# Altium PCB button.PcbDoc
Units mil, origin at the board's own origin, x right, y up, seen from the top; angles counter-clockwise.
Board outline 1750 x 1200 mil, 4 copper layers (Top Layer, Int1 (GND), Int2 (3V3), Bottom Layer), stack 53.212 mil thick; 18 components, 10 nets, 58 pads, 6 vias.
Unrouted connection lines stored in the file: 8.
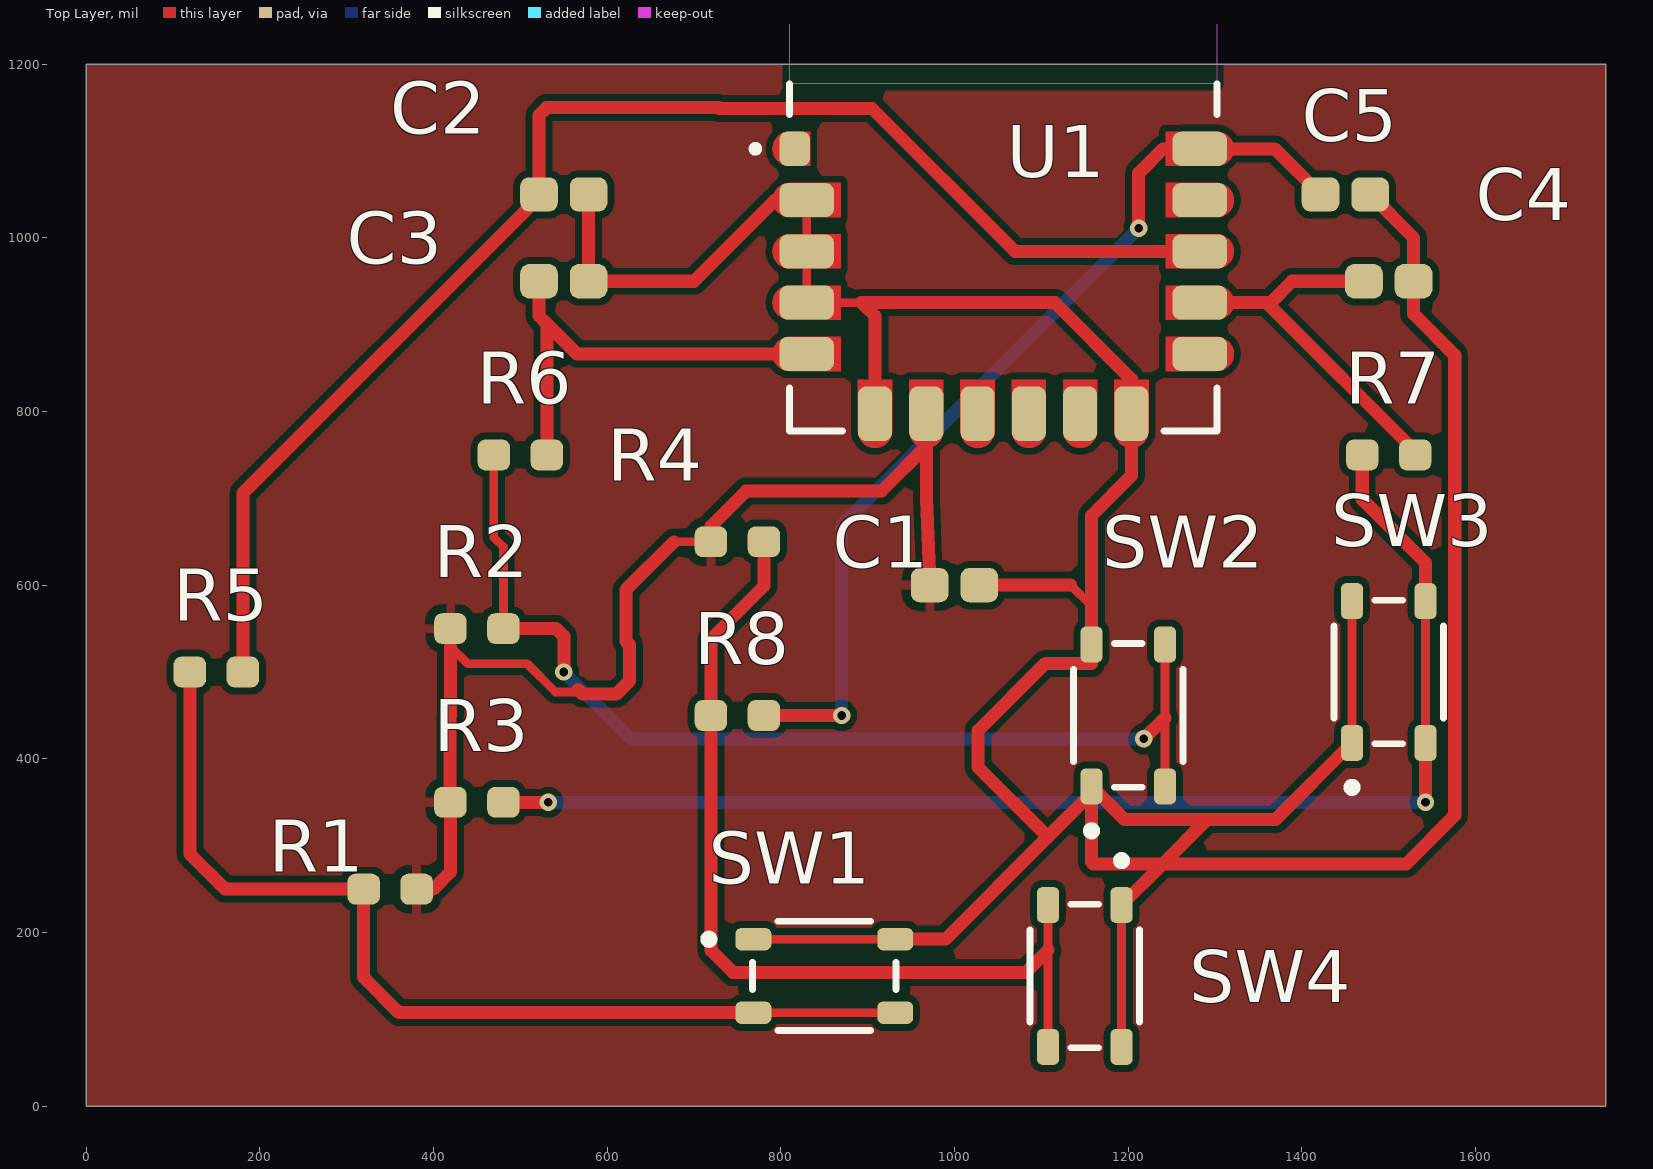
[diagram p0: Top Layer view]
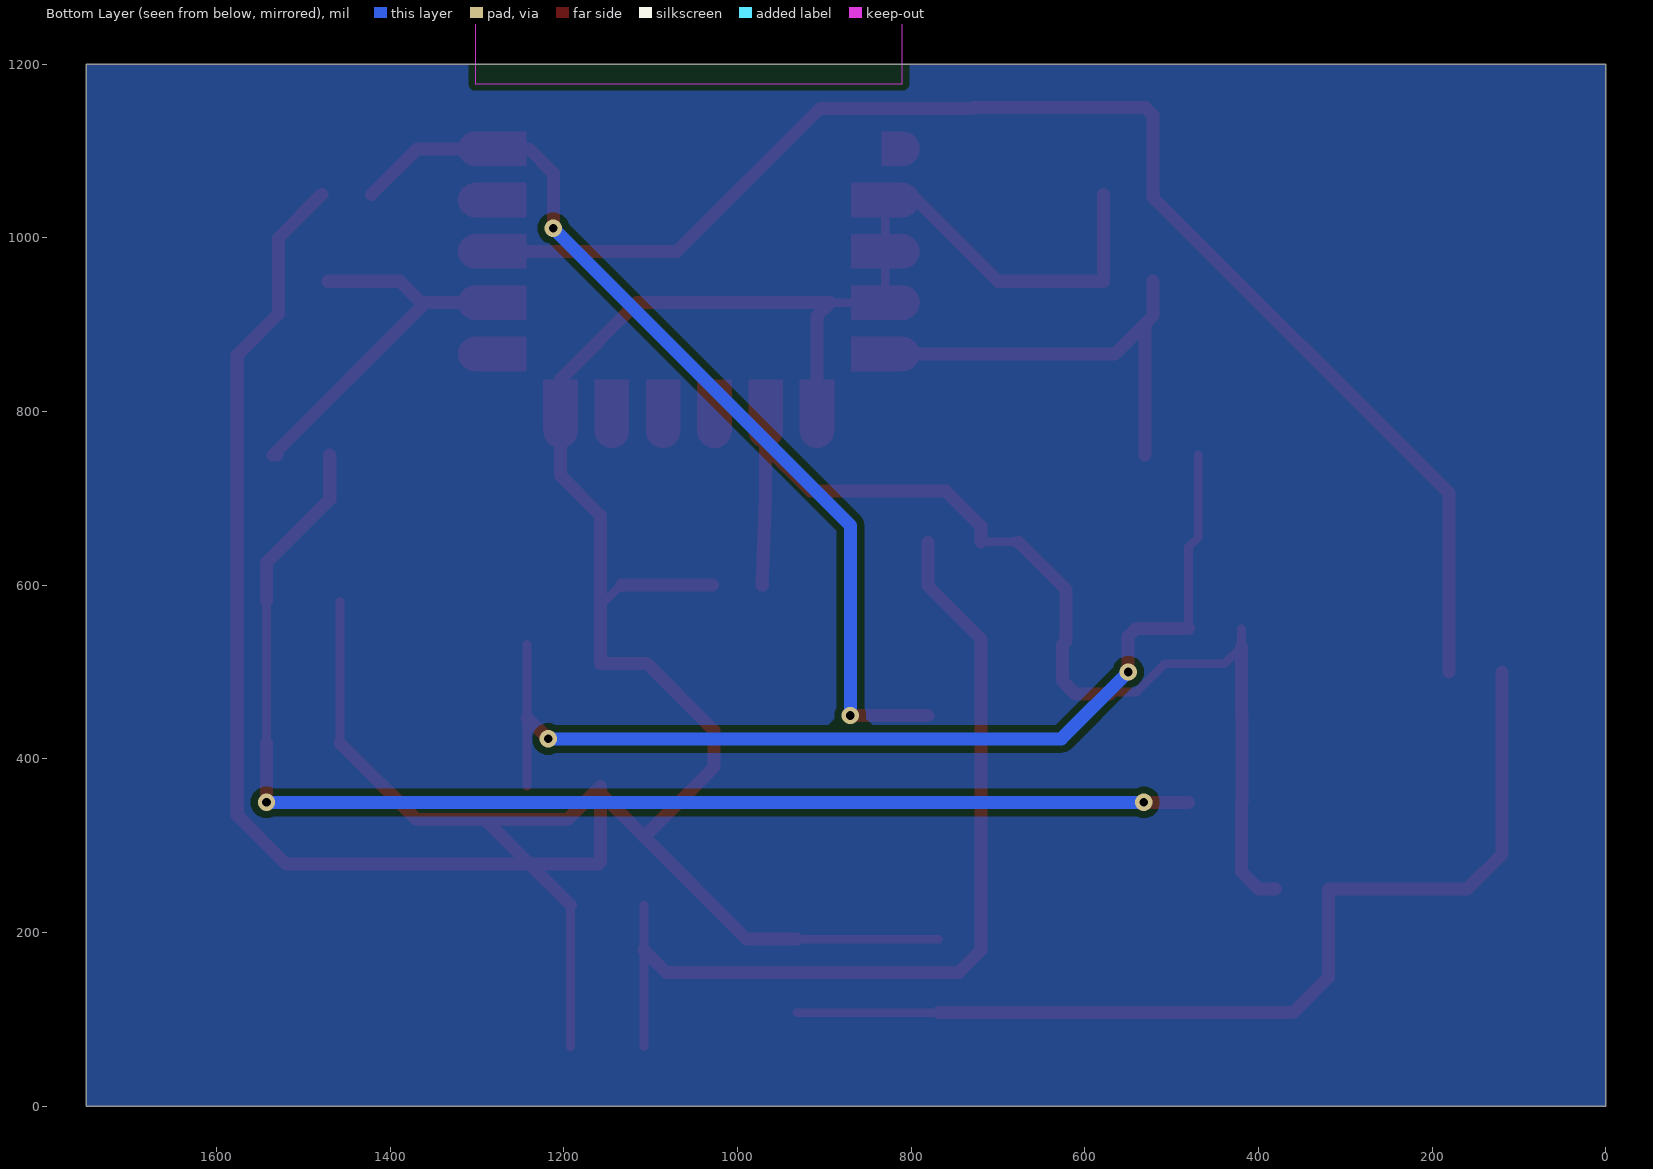
[diagram p1: Bottom Layer view, seen from below]
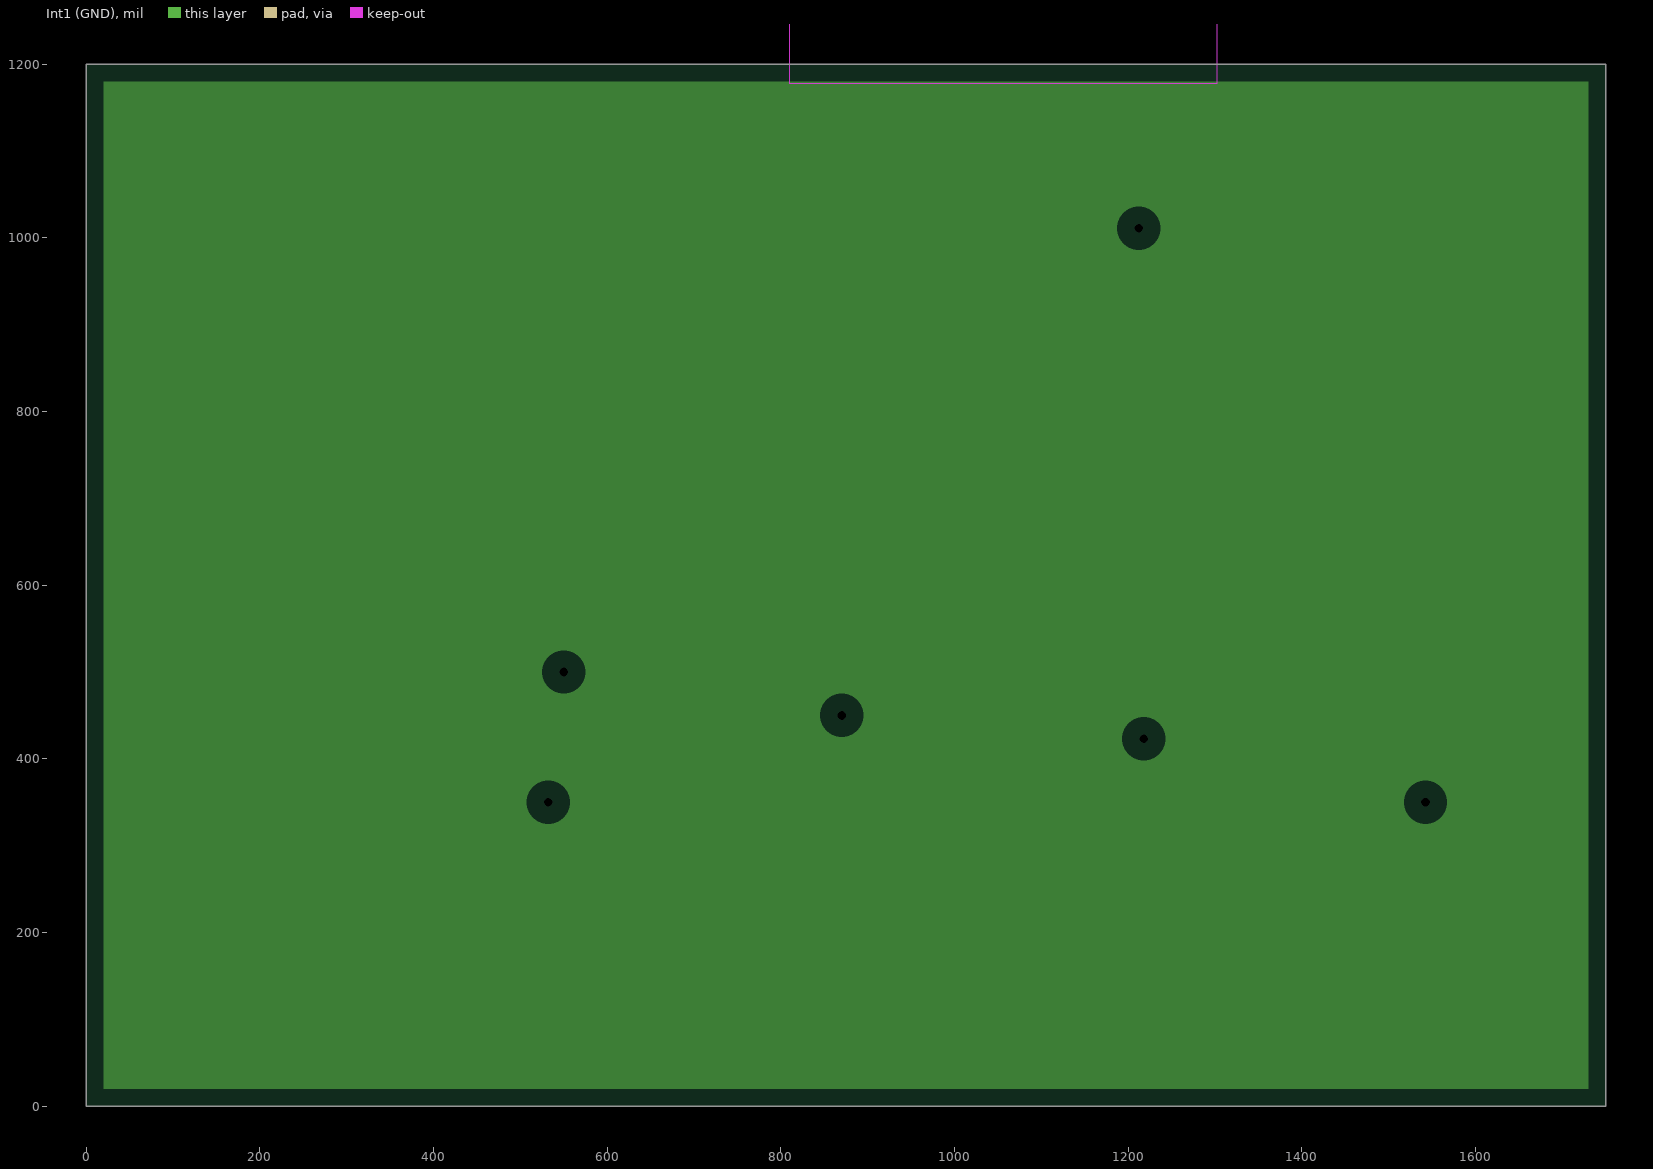
[diagram p2: Int1 (GND), clearances drawn from the general rule]
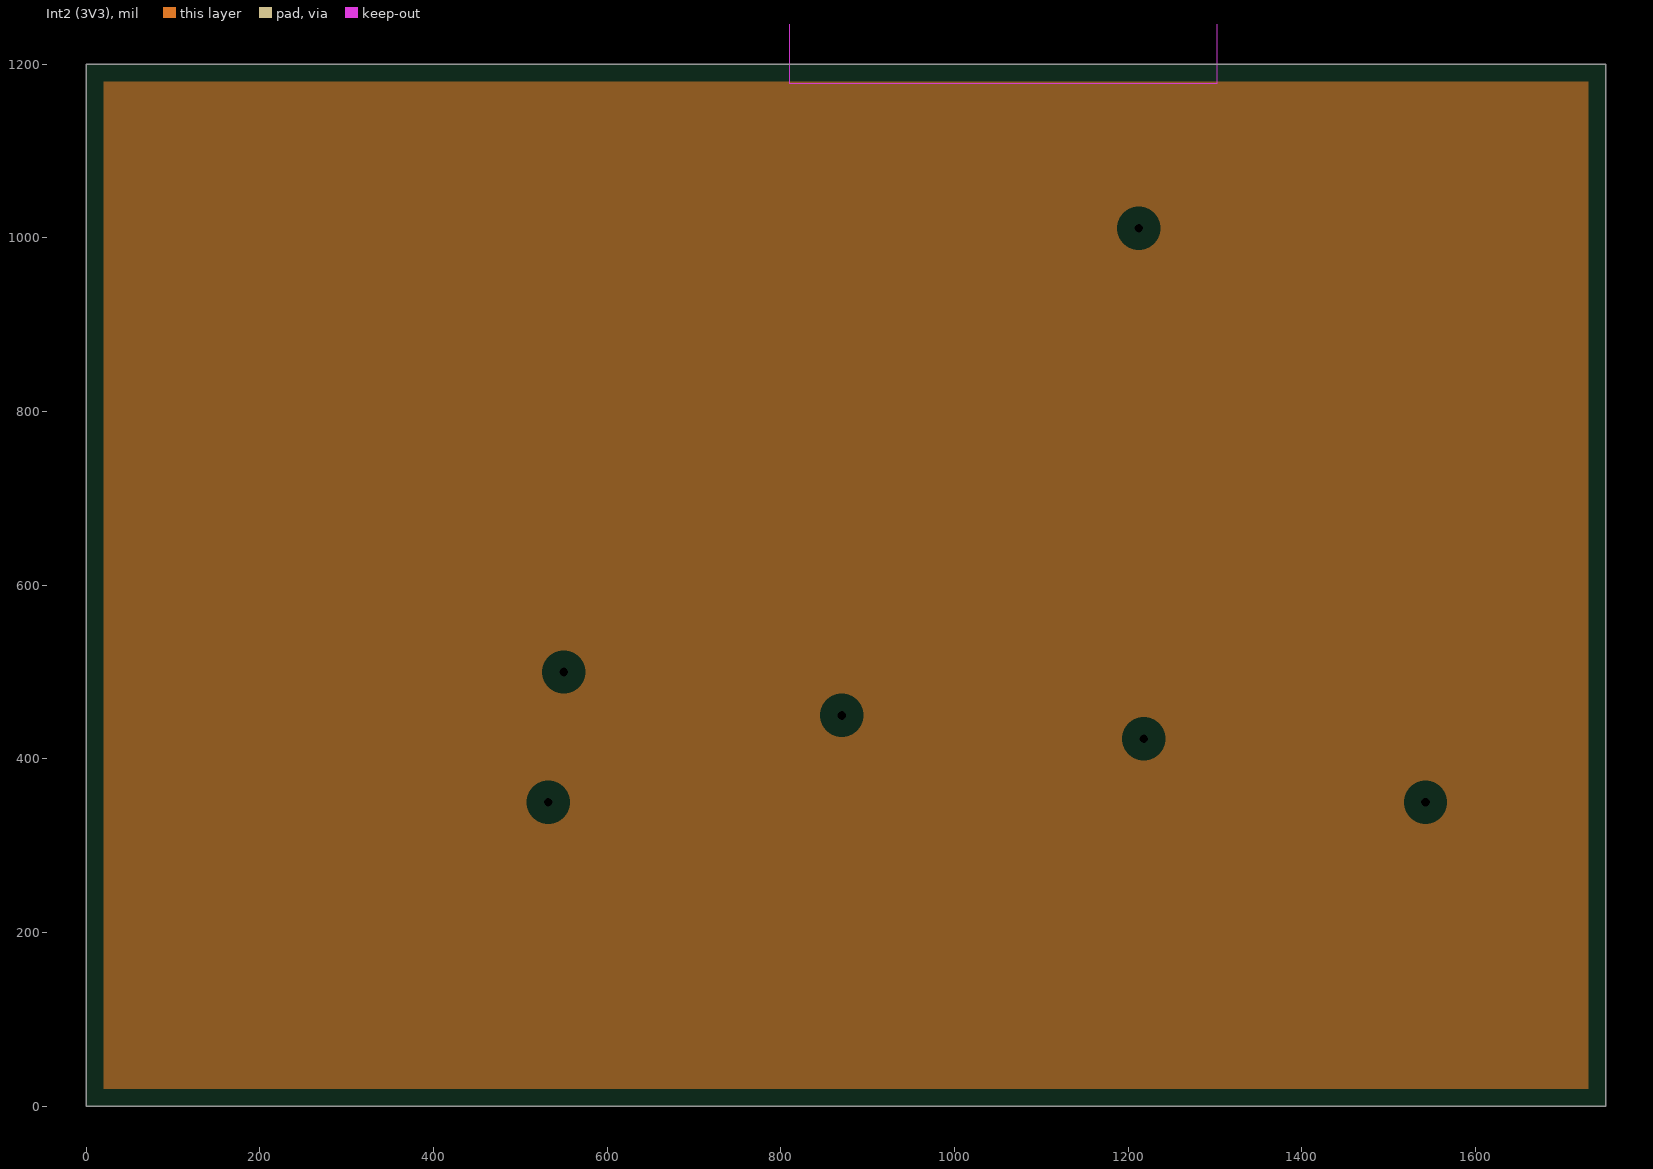
[diagram p3: Int2 (3V3), clearances drawn from the general rule]
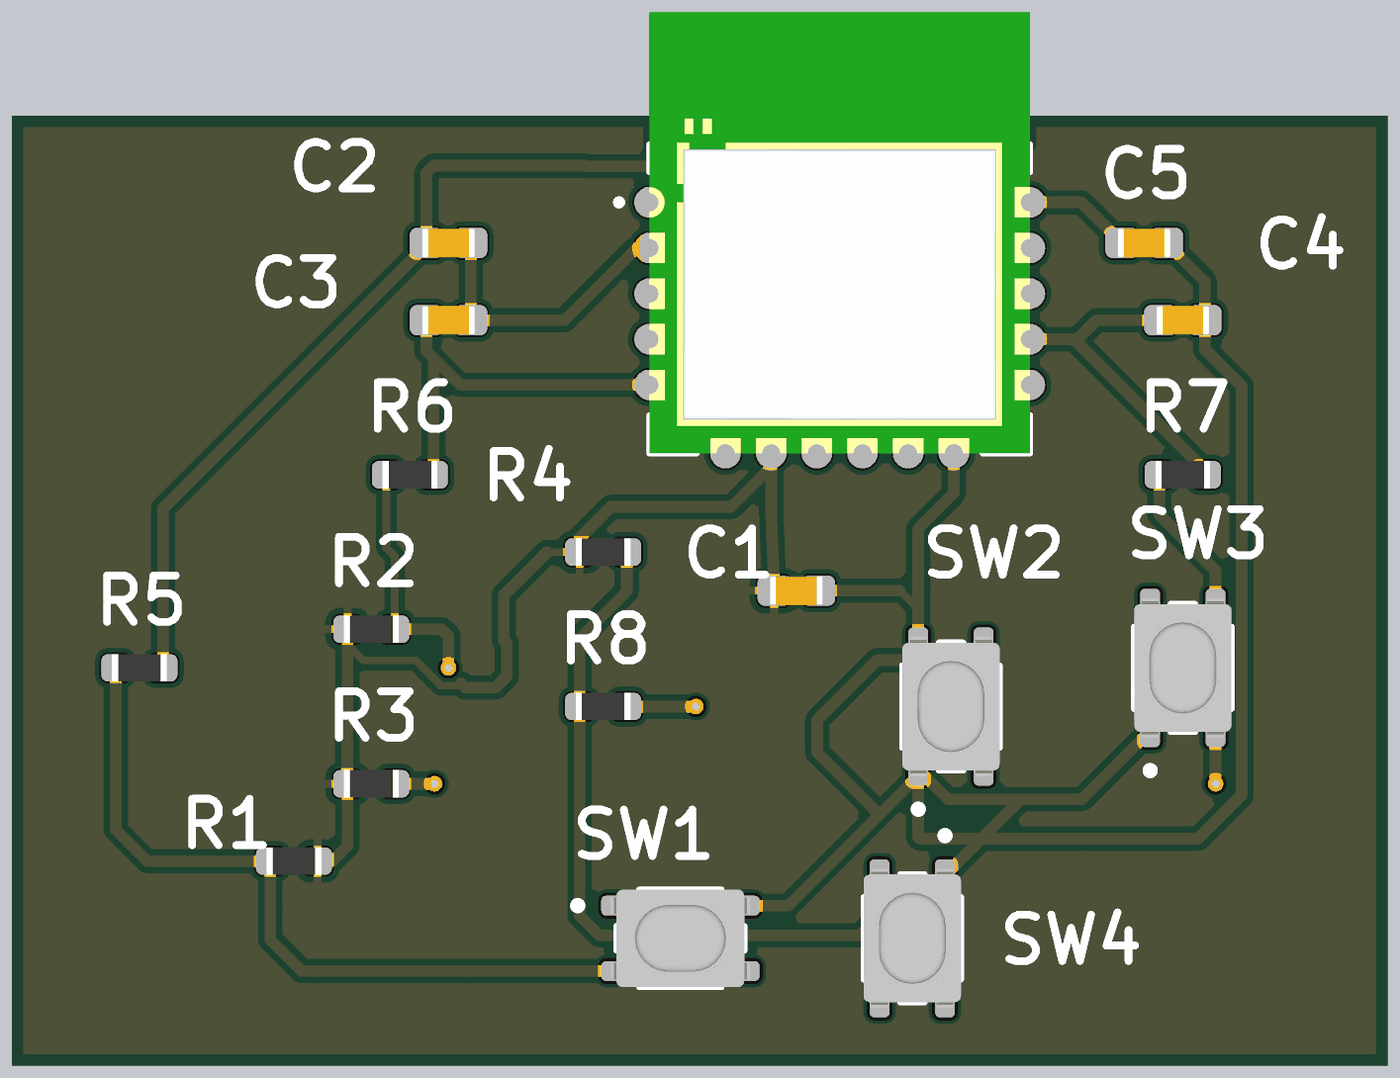
[diagram p4: 3D render of the assembled board from above, using the file's embedded part models]

## Layer stack, top to bottom
Top Solder: solder mask 1, SM-001, Dk 4
Top Layer: signal copper 1.378
Dielectric 2: prepreg 3.1, PP-008, Dk 4.1
Dielectric 4: prepreg 2.8, PP-006, Dk 4.1
Int1 (GND): plane copper 1.378, net GND
Dielectric 1: core 39, Core-042, Dk 4.6
Int2 (3V3): plane copper 1.378, net 3V3
Dielectric 3: prepreg 2.8, PP-006, Dk 4.1
Bottom Layer: signal copper 1.378
Bottom Solder: solder mask 0.4, Solder Resist, Dk 3.5

## Board outline
0,0 0,1200 1750,1200 1750,0

## Design rules (kind name [scope] priority, off if disabled: settings)
Clearance Power_Class_Clearance [All] p1: gap=8 ignorepadtopadclearanceinfootprint=FALSE
Clearance Global_Nets_Clearnace_Rule [All] p2: gap=6 ignorepadtopadclearanceinfootprint=FALSE
Clearance [All] p3: gap=15 ignorepadtopadclearanceinfootprint=FALSE
ComponentClearance ComponentClearance_1 [All] p1: gap=10 collisioncheckmode=3 verticalgap=10 showdistances=FALSE
ComponentClearance ComponentGlobalClearance [All] p2: gap=20 collisioncheckmode=3 verticalgap=20 showdistances=FALSE
MinimumSolderMaskSliver [All] p1: minsoldermaskwidth=8
PlaneClearance [All] p1: clearance=20
PlaneConnect [All] p1: planeconnectstyle=Relief reliefexpansion=20 reliefentries=4 reliefconductorwidth=10 reliefairgap=10
PolygonConnect [All] p1: connectstyle=Relief reliefconductorwidth=10 reliefentries=4 polygonreliefangle="90 Angle" airgapwidth=10
RoutingVias RoutingVias_Power [InNetClass('Power')] p1: holewidth=10 width=24 viastyle="Through Hole" minholewidth=10 minwidth=24 maxholewidth=10 maxwidth=24
RoutingVias RoutingVias_Signal [All] p2: holewidth=10 width=20 viastyle="Through Hole" minholewidth=10 minwidth=20 maxholewidth=10 maxwidth=20
RoutingVias [All] p3: holewidth=28 width=50 viastyle="Through Hole" minholewidth=28 minwidth=50 maxholewidth=28 maxwidth=50
SilkToSilkClearance [All] p1: silktosilkclearance=8
SilkToSolderMaskClearance [IsPad] p1: minsilkscreentomaskgap=4 clearancetoexposedcopper=TRUE
SolderMaskExpansion [All] p1: expansion=4 istentingtop=FALSE
SupplyNets "Schematic Supply Nets_2" [InNet('GND')] p1: voltage=0.000
SupplyNets "Schematic Supply Nets_1" [InNet('3V3')] p2: voltage=0.000
UnRoutedNet [All] p1: checkbadconnections=TRUE
Width Width_1 [All] p1: maxlimit=20 minlimit=10 preferedwidth=15
Width WidthPowerClass [InNetClass('Power')] p2: maxlimit=100 minlimit=30 preferedwidth=50
Width WidthGlobalNets [All] p3: maxlimit=6 minlimit=6 preferedwidth=6
23 further rules are at their usual default settings.

## Classes and differential pairs
net class Power: 3V3 GND

## Components (designator, comment, footprint, x,y, rotation, side; value= is the part's Value field where it differs from the comment)
C1 "10uF" CAPC1608X10N 1000,600 r0 top
C2 "10uF" CAPC1608X10N 550,1050 r0 top
C3 "10uF" CAPC1608X10N 550,950 r0 top
C4 "10uF" CAPC1608X10N 1500,950 r0 top
C5 "10uF" CAPC1608X10N 1450,1050 r0 top
R1 "10K" RESC1608X06N 350,250 r180 top
R2 "10K" RESC1608X06N 450,550 r0 top
R3 "10K" RESC1608X06N 450,350 r0 top
R4 "10K" RESC1608X06N 750,650 r0 top
R5 "47K" RESC1608X06N 150,500 r0 top
R6 "47K" RESC1608X06N 500,750 r0 top
R7 "47K" RESC1608X06N 1500,750 r0 top
R8 "47K" RESC1608X06N 750,450 r0 top
SW1 "SW, Momentary" SW_PTS810 850,150 r0 top
SW2 "SW, Momentary" SW_PTS810 1200,450 r90 top
SW3 "SW, Momentary" SW_PTS810 1500,500 r90 top
SW4 "SW, Momentary" SW_PTS810 1150,150 r270 top
U1 "DA14531MOD" DLG_DA14531MOD-00F01002 1056.03,950 r0 top

## Footprints (in the part's own frame and the unit in brackets; to place one, negate y for a bottom-side part, rotate by r counter-clockwise, add the part's x,y. Pads: shape width x height; smd on the part's side, far side on the other; paste and mask are expansions set on the pad)
CAPC1608X10N [mm] "Chip Capacitor, 2-Leads, Body 1.60x0.80mm, Murata, IPC Medium Density"
  rrect50% 1.1x1 smd mask+0.064: 1(-0.725,0) 2(0.725,0)
  body extent -0.87,-0.48 0.87,0.48, height 0.95
DLG_DA14531MOD-00F01002 [mm] "Dialog, DA14531MOD"
  rrect50% 0.9x1 smd paste-1 mask+0: J1(-6.1,3.875)
  rrect50% 1.6x1 smd paste+0 mask+0: J2(-5.75,2.375) J3(-5.75,0.875) J4(-5.75,-0.625) J5(-5.75,-2.125)
  rrect50% 1x1.6 smd paste+0 mask+0: J6(-3.75,-3.875)
  rrect50% 1x1.6 smd paste-1 mask+0: J7(-2.25,-3.875) J8(-0.75,-3.875) J9(0.75,-3.875) J10(2.25,-3.875) J11(3.75,-3.875)
  rrect50% 1.6x1 smd paste-1 mask+0: J12(5.75,-2.125) J13(5.75,-0.625) J14(5.75,0.875) J15(5.75,2.375) J16(5.75,3.875)
  Top Layer region: -4.75,1.875 -6.25,1.875 -6.276,1.876 -6.302,1.878 -6.328,1.881 -6.354,1.886 -6.379,1.892 -6.405,1.899 -6.429,1.908 -6.453,1.918 -6.477,1.929 -6.5,1.942 -6.522,1.956 -6.544,1.97 -6.565,1.986 -6.585,2.003 -6.604,2.021 -6.622,2.04 -6.639,2.06 -6.655,2.081 -6.669,2.103 -6.683,2.125 -6.696,2.148 -6.707,2.172 -6.717,2.196 -6.726,2.22 -6.733,2.246 -6.739,2.271 -6.744,2.297 -6.747,2.323 -6.749,2.349 -6.75,2.375 -6.749,2.401 -6.747,2.427 -6.744,2.453 -6.739,2.479 -6.733,2.504 -6.726,2.53 -6.717,2.554 -6.707,2.578 -6.696,2.602 -6.683,2.625 -6.669,2.647 -6.655,2.669 -6.639,2.69 -6.622,2.71 -6.604,2.729 -6.585,2.747 -6.565,2.764 -6.544,2.78 -6.522,2.794 -6.5,2.808 -6.477,2.821 -6.453,2.832 -6.429,2.842 -6.405,2.851 -6.379,2.858 -6.354,2.864 -6.328,2.869 -6.302,2.872 -6.276,2.874 -6.25,2.875 -4.75,2.875
  Top Layer region: 6.276,4.374 6.302,4.372 6.328,4.369 6.354,4.364 6.379,4.358 6.405,4.351 6.429,4.342 6.453,4.332 6.477,4.321 6.5,4.308 6.522,4.294 6.544,4.28 6.565,4.264 6.585,4.247 6.604,4.229 6.622,4.21 6.639,4.19 6.655,4.169 6.669,4.147 6.683,4.125 6.696,4.102 6.707,4.078 6.717,4.054 6.726,4.03 6.733,4.004 6.739,3.979 6.744,3.953 6.747,3.927 6.749,3.901 6.75,3.875 6.749,3.849 6.747,3.823 6.744,3.797 6.739,3.771 6.733,3.746 6.726,3.72 6.717,3.696 6.707,3.672 6.696,3.648 6.683,3.625 6.669,3.603 6.655,3.581 6.639,3.56 6.622,3.54 6.604,3.521 6.585,3.503 6.565,3.486 6.544,3.47 6.522,3.456 6.5,3.442 6.477,3.429 6.453,3.418 6.429,3.408 6.405,3.399 6.379,3.392 6.354,3.386 6.328,3.381 6.302,3.378 6.276,3.376 6.25,3.375 4.75,3.375 4.75,4.375 6.25,4.375
  Top Layer region: 6.276,1.374 6.302,1.372 6.328,1.369 6.354,1.364 6.379,1.358 6.405,1.351 6.429,1.342 6.453,1.332 6.477,1.321 6.5,1.308 6.522,1.294 6.544,1.28 6.565,1.264 6.585,1.247 6.604,1.229 6.622,1.21 6.639,1.19 6.655,1.169 6.669,1.147 6.683,1.125 6.696,1.102 6.707,1.078 6.717,1.054 6.726,1.03 6.733,1.004 6.739,0.979 6.744,0.953 6.747,0.927 6.749,0.901 6.75,0.875 6.749,0.849 6.747,0.823 6.744,0.797 6.739,0.771 6.733,0.746 6.726,0.72 6.717,0.696 6.707,0.672 6.696,0.648 6.683,0.625 6.669,0.603 6.655,0.581 6.639,0.56 6.622,0.54 6.604,0.521 6.585,0.503 6.565,0.486 6.544,0.47 6.522,0.456 6.5,0.442 6.477,0.429 6.453,0.418 6.429,0.408 6.405,0.399 6.379,0.392 6.354,0.386 6.328,0.381 6.302,0.378 6.276,0.376 6.25,0.375 4.75,0.375 4.75,1.375 6.25,1.375
  Top Layer region: 6.276,-0.126 6.302,-0.128 6.328,-0.131 6.354,-0.136 6.379,-0.142 6.405,-0.149 6.429,-0.158 6.453,-0.168 6.477,-0.179 6.5,-0.192 6.522,-0.206 6.544,-0.22 6.565,-0.236 6.585,-0.253 6.604,-0.271 6.622,-0.29 6.639,-0.31 6.655,-0.331 6.669,-0.353 6.683,-0.375 6.696,-0.398 6.707,-0.422 6.717,-0.446 6.726,-0.47 6.733,-0.496 6.739,-0.521 6.744,-0.547 6.747,-0.573 6.749,-0.599 6.75,-0.625 6.749,-0.651 6.747,-0.677 6.744,-0.703 6.739,-0.729 6.733,-0.754 6.726,-0.78 6.717,-0.804 6.707,-0.828 6.696,-0.852 6.683,-0.875 6.669,-0.897 6.655,-0.919 6.639,-0.94 6.622,-0.96 6.604,-0.979 6.585,-0.997 6.565,-1.014 6.544,-1.03 6.522,-1.044 6.5,-1.058 6.477,-1.071 6.453,-1.082 6.429,-1.092 6.405,-1.101 6.379,-1.108 6.354,-1.114 6.328,-1.119 6.302,-1.122 6.276,-1.124 6.25,-1.125 4.75,-1.125 4.75,-0.125 6.25,-0.125
  Top Layer region: 6.276,-1.626 6.302,-1.628 6.328,-1.631 6.354,-1.636 6.379,-1.642 6.405,-1.649 6.429,-1.658 6.453,-1.668 6.477,-1.679 6.5,-1.692 6.522,-1.706 6.544,-1.72 6.565,-1.736 6.585,-1.753 6.604,-1.771 6.622,-1.79 6.639,-1.81 6.655,-1.831 6.669,-1.853 6.683,-1.875 6.696,-1.898 6.707,-1.922 6.717,-1.946 6.726,-1.97 6.733,-1.996 6.739,-2.021 6.744,-2.047 6.747,-2.073 6.749,-2.099 6.75,-2.125 6.749,-2.151 6.747,-2.177 6.744,-2.203 6.739,-2.229 6.733,-2.254 6.726,-2.28 6.717,-2.304 6.707,-2.328 6.696,-2.352 6.683,-2.375 6.669,-2.397 6.655,-2.419 6.639,-2.44 6.622,-2.46 6.604,-2.479 6.585,-2.497 6.565,-2.514 6.544,-2.53 6.522,-2.544 6.5,-2.558 6.477,-2.571 6.453,-2.582 6.429,-2.592 6.405,-2.601 6.379,-2.608 6.354,-2.614 6.328,-2.619 6.302,-2.622 6.276,-2.624 6.25,-2.625 4.75,-2.625 4.75,-1.625 6.25,-1.625
  Top Layer region: 4.25,-4.375 4.249,-4.401 4.247,-4.427 4.244,-4.453 4.239,-4.479 4.233,-4.504 4.226,-4.53 4.217,-4.554 4.207,-4.578 4.196,-4.602 4.183,-4.625 4.169,-4.647 4.155,-4.669 4.139,-4.69 4.122,-4.71 4.104,-4.729 4.085,-4.747 4.065,-4.764 4.044,-4.78 4.022,-4.794 4,-4.808 3.977,-4.821 3.953,-4.832 3.929,-4.842 3.905,-4.851 3.879,-4.858 3.854,-4.864 3.828,-4.869 3.802,-4.872 3.776,-4.874 3.75,-4.875 3.724,-4.874 3.698,-4.872 3.672,-4.869 3.646,-4.864 3.621,-4.858 3.595,-4.851 3.571,-4.842 3.547,-4.832 3.523,-4.821 3.5,-4.808 3.478,-4.794 3.456,-4.78 3.435,-4.764 3.415,-4.747 3.396,-4.729 3.378,-4.71 3.361,-4.69 3.345,-4.669 3.331,-4.647 3.317,-4.625 3.304,-4.602 3.293,-4.578 3.283,-4.554 3.274,-4.53 3.267,-4.504 3.261,-4.479 3.256,-4.453 3.253,-4.427 3.251,-4.401 3.25,-4.375 3.25,-2.875 4.25,-2.875
  Top Layer region: 2.75,-4.375 2.749,-4.401 2.747,-4.427 2.744,-4.453 2.739,-4.479 2.733,-4.504 2.726,-4.53 2.717,-4.554 2.707,-4.578 2.696,-4.602 2.683,-4.625 2.669,-4.647 2.655,-4.669 2.639,-4.69 2.622,-4.71 2.604,-4.729 2.585,-4.747 2.565,-4.764 2.544,-4.78 2.522,-4.794 2.5,-4.808 2.477,-4.821 2.453,-4.832 2.429,-4.842 2.405,-4.851 2.379,-4.858 2.354,-4.864 2.328,-4.869 2.302,-4.872 2.276,-4.874 2.25,-4.875 2.224,-4.874 2.198,-4.872 2.172,-4.869 2.146,-4.864 2.121,-4.858 2.095,-4.851 2.071,-4.842 2.047,-4.832 2.023,-4.821 2,-4.808 1.978,-4.794 1.956,-4.78 1.935,-4.764 1.915,-4.747 1.896,-4.729 1.878,-4.71 1.861,-4.69 1.845,-4.669 1.831,-4.647 1.817,-4.625 1.804,-4.602 1.793,-4.578 1.783,-4.554 1.774,-4.53 1.767,-4.504 1.761,-4.479 1.756,-4.453 1.753,-4.427 1.751,-4.401 1.75,-4.375 1.75,-2.875 2.75,-2.875
  Top Layer region: 1.25,-4.375 1.249,-4.401 1.247,-4.427 1.244,-4.453 1.239,-4.479 1.233,-4.504 1.226,-4.53 1.217,-4.554 1.207,-4.578 1.196,-4.602 1.183,-4.625 1.169,-4.647 1.155,-4.669 1.139,-4.69 1.122,-4.71 1.104,-4.729 1.085,-4.747 1.065,-4.764 1.044,-4.78 1.022,-4.794 1,-4.808 0.977,-4.821 0.953,-4.832 0.929,-4.842 0.905,-4.851 0.879,-4.858 0.854,-4.864 0.828,-4.869 0.802,-4.872 0.776,-4.874 0.75,-4.875 0.724,-4.874 0.698,-4.872 0.672,-4.869 0.646,-4.864 0.621,-4.858 0.595,-4.851 0.571,-4.842 0.547,-4.832 0.523,-4.821 0.5,-4.808 0.478,-4.794 0.456,-4.78 0.435,-4.764 0.415,-4.747 0.396,-4.729 0.378,-4.71 0.361,-4.69 0.345,-4.669 0.331,-4.647 0.317,-4.625 0.304,-4.602 0.293,-4.578 0.283,-4.554 0.274,-4.53 0.267,-4.504 0.261,-4.479 0.256,-4.453 0.253,-4.427 0.251,-4.401 0.25,-4.375 0.25,-2.875 1.25,-2.875
  Top Layer region: -0.25,-4.375 -0.251,-4.401 -0.253,-4.427 -0.256,-4.453 -0.261,-4.479 -0.267,-4.504 -0.274,-4.53 -0.283,-4.554 -0.293,-4.578 -0.304,-4.602 -0.317,-4.625 -0.331,-4.647 -0.345,-4.669 -0.361,-4.69 -0.378,-4.71 -0.396,-4.729 -0.415,-4.747 -0.435,-4.764 -0.456,-4.78 -0.478,-4.794 -0.5,-4.808 -0.523,-4.821 -0.547,-4.832 -0.571,-4.842 -0.595,-4.851 -0.621,-4.858 -0.646,-4.864 -0.672,-4.869 -0.698,-4.872 -0.724,-4.874 -0.75,-4.875 -0.776,-4.874 -0.802,-4.872 -0.828,-4.869 -0.854,-4.864 -0.879,-4.858 -0.905,-4.851 -0.929,-4.842 -0.953,-4.832 -0.977,-4.821 -1,-4.808 -1.022,-4.794 -1.044,-4.78 -1.065,-4.764 -1.085,-4.747 -1.104,-4.729 -1.122,-4.71 -1.139,-4.69 -1.155,-4.669 -1.169,-4.647 -1.183,-4.625 -1.196,-4.602 -1.207,-4.578 -1.217,-4.554 -1.226,-4.53 -1.233,-4.504 -1.239,-4.479 -1.244,-4.453 -1.247,-4.427 -1.249,-4.401 -1.25,-4.375 -1.25,-2.875 -0.25,-2.875
  Top Layer region: -1.75,-4.375 -1.751,-4.401 -1.753,-4.427 -1.756,-4.453 -1.761,-4.479 -1.767,-4.504 -1.774,-4.53 -1.783,-4.554 -1.793,-4.578 -1.804,-4.602 -1.817,-4.625 -1.831,-4.647 -1.845,-4.669 -1.861,-4.69 -1.878,-4.71 -1.896,-4.729 -1.915,-4.747 -1.935,-4.764 -1.956,-4.78 -1.978,-4.794 -2,-4.808 -2.023,-4.821 -2.047,-4.832 -2.071,-4.842 -2.095,-4.851 -2.121,-4.858 -2.146,-4.864 -2.172,-4.869 -2.198,-4.872 -2.224,-4.874 -2.25,-4.875 -2.276,-4.874 -2.302,-4.872 -2.328,-4.869 -2.354,-4.864 -2.379,-4.858 -2.405,-4.851 -2.429,-4.842 -2.453,-4.832 -2.477,-4.821 -2.5,-4.808 -2.522,-4.794 -2.544,-4.78 -2.565,-4.764 -2.585,-4.747 -2.604,-4.729 -2.622,-4.71 -2.639,-4.69 -2.655,-4.669 -2.669,-4.647 -2.683,-4.625 -2.696,-4.602 -2.707,-4.578 -2.717,-4.554 -2.726,-4.53 -2.733,-4.504 -2.739,-4.479 -2.744,-4.453 -2.747,-4.427 -2.749,-4.401 -2.75,-4.375 -2.75,-2.875 -1.75,-2.875
  Top Layer region: -3.25,-4.375 -3.251,-4.401 -3.253,-4.427 -3.256,-4.453 -3.261,-4.479 -3.267,-4.504 -3.274,-4.53 -3.283,-4.554 -3.293,-4.578 -3.304,-4.602 -3.317,-4.625 -3.331,-4.647 -3.345,-4.669 -3.361,-4.69 -3.378,-4.71 -3.396,-4.729 -3.415,-4.747 -3.435,-4.764 -3.456,-4.78 -3.478,-4.794 -3.5,-4.808 -3.523,-4.821 -3.547,-4.832 -3.571,-4.842 -3.595,-4.851 -3.621,-4.858 -3.646,-4.864 -3.672,-4.869 -3.698,-4.872 -3.724,-4.874 -3.75,-4.875 -3.776,-4.874 -3.802,-4.872 -3.828,-4.869 -3.854,-4.864 -3.879,-4.858 -3.905,-4.851 -3.929,-4.842 -3.953,-4.832 -3.977,-4.821 -4,-4.808 -4.022,-4.794 -4.044,-4.78 -4.065,-4.764 -4.085,-4.747 -4.104,-4.729 -4.122,-4.71 -4.139,-4.69 -4.155,-4.669 -4.169,-4.647 -4.183,-4.625 -4.196,-4.602 -4.207,-4.578 -4.217,-4.554 -4.226,-4.53 -4.233,-4.504 -4.239,-4.479 -4.244,-4.453 -4.247,-4.427 -4.249,-4.401 -4.25,-4.375 -4.25,-2.875 -3.25,-2.875
  Top Layer region: -4.75,-2.625 -6.25,-2.625 -6.276,-2.624 -6.302,-2.622 -6.328,-2.619 -6.354,-2.614 -6.379,-2.608 -6.405,-2.601 -6.429,-2.592 -6.453,-2.582 -6.477,-2.571 -6.5,-2.558 -6.522,-2.544 -6.544,-2.53 -6.565,-2.514 -6.585,-2.497 -6.604,-2.479 -6.622,-2.46 -6.639,-2.44 -6.655,-2.419 -6.669,-2.397 -6.683,-2.375 -6.696,-2.352 -6.707,-2.328 -6.717,-2.304 -6.726,-2.28 -6.733,-2.254 -6.739,-2.229 -6.744,-2.203 -6.747,-2.177 -6.749,-2.151 -6.75,-2.125 -6.749,-2.099 -6.747,-2.073 -6.744,-2.047 -6.739,-2.021 -6.733,-1.996 -6.726,-1.97 -6.717,-1.946 -6.707,-1.922 -6.696,-1.898 -6.683,-1.875 -6.669,-1.853 -6.655,-1.831 -6.639,-1.81 -6.622,-1.79 -6.604,-1.771 -6.585,-1.753 -6.565,-1.736 -6.544,-1.72 -6.522,-1.706 -6.5,-1.692 -6.477,-1.679 -6.453,-1.668 -6.429,-1.658 -6.405,-1.649 -6.379,-1.642 -6.354,-1.636 -6.328,-1.631 -6.302,-1.628 -6.276,-1.626 -6.25,-1.625 -4.75,-1.625
  Top Layer region: -4.75,-1.125 -6.25,-1.125 -6.276,-1.124 -6.302,-1.122 -6.328,-1.119 -6.354,-1.114 -6.379,-1.108 -6.405,-1.101 -6.429,-1.092 -6.453,-1.082 -6.477,-1.071 -6.5,-1.058 -6.522,-1.044 -6.544,-1.03 -6.565,-1.014 -6.585,-0.997 -6.604,-0.979 -6.622,-0.96 -6.639,-0.94 -6.655,-0.919 -6.669,-0.897 -6.683,-0.875 -6.696,-0.852 -6.707,-0.828 -6.717,-0.804 -6.726,-0.78 -6.733,-0.754 -6.739,-0.729 -6.744,-0.703 -6.747,-0.677 -6.749,-0.651 -6.75,-0.625 -6.749,-0.599 -6.747,-0.573 -6.744,-0.547 -6.739,-0.521 -6.733,-0.496 -6.726,-0.47 -6.717,-0.446 -6.707,-0.422 -6.696,-0.398 -6.683,-0.375 -6.669,-0.353 -6.655,-0.331 -6.639,-0.31 -6.622,-0.29 -6.604,-0.271 -6.585,-0.253 -6.565,-0.236 -6.544,-0.22 -6.522,-0.206 -6.5,-0.192 -6.477,-0.179 -6.453,-0.168 -6.429,-0.158 -6.405,-0.149 -6.379,-0.142 -6.354,-0.136 -6.328,-0.131 -6.302,-0.128 -6.276,-0.126 -6.25,-0.125 -4.75,-0.125
  Top Layer region: -4.75,0.375 -6.25,0.375 -6.276,0.376 -6.302,0.378 -6.328,0.381 -6.354,0.386 -6.379,0.392 -6.405,0.399 -6.429,0.408 -6.453,0.418 -6.477,0.429 -6.5,0.442 -6.522,0.456 -6.544,0.47 -6.565,0.486 -6.585,0.503 -6.604,0.521 -6.622,0.54 -6.639,0.56 -6.655,0.581 -6.669,0.603 -6.683,0.625 -6.696,0.648 -6.707,0.672 -6.717,0.696 -6.726,0.72 -6.733,0.746 -6.739,0.771 -6.744,0.797 -6.747,0.823 -6.749,0.849 -6.75,0.875 -6.749,0.901 -6.747,0.927 -6.744,0.953 -6.739,0.979 -6.733,1.004 -6.726,1.03 -6.717,1.054 -6.707,1.078 -6.696,1.102 -6.683,1.125 -6.669,1.147 -6.655,1.169 -6.639,1.19 -6.622,1.21 -6.604,1.229 -6.585,1.247 -6.565,1.264 -6.544,1.28 -6.522,1.294 -6.5,1.308 -6.477,1.321 -6.453,1.332 -6.429,1.342 -6.405,1.351 -6.379,1.358 -6.354,1.364 -6.328,1.369 -6.302,1.372 -6.276,1.374 -6.25,1.375 -4.75,1.375
  Top Layer region: -4.75,1.875 -6.25,1.875 -6.276,1.876 -6.302,1.878 -6.328,1.881 -6.354,1.886 -6.379,1.892 -6.405,1.899 -6.429,1.908 -6.453,1.918 -6.477,1.929 -6.5,1.942 -6.522,1.956 -6.544,1.97 -6.565,1.986 -6.585,2.003 -6.604,2.021 -6.622,2.04 -6.639,2.06 -6.655,2.081 -6.669,2.103 -6.683,2.125 -6.696,2.148 -6.707,2.172 -6.717,2.196 -6.726,2.22 -6.733,2.246 -6.739,2.271 -6.744,2.297 -6.747,2.323 -6.749,2.349 -6.75,2.375 -6.749,2.401 -6.747,2.427 -6.744,2.453 -6.739,2.479 -6.733,2.504 -6.726,2.53 -6.717,2.554 -6.707,2.578 -6.696,2.602 -6.683,2.625 -6.669,2.647 -6.655,2.669 -6.639,2.69 -6.622,2.71 -6.604,2.729 -6.585,2.747 -6.565,2.764 -6.544,2.78 -6.522,2.794 -6.5,2.808 -6.477,2.821 -6.453,2.832 -6.429,2.842 -6.405,2.851 -6.379,2.858 -6.354,2.864 -6.328,2.869 -6.302,2.872 -6.276,2.874 -6.25,2.875 -4.75,2.875
  Top Layer region: -5.65,3.375 -6.25,3.375 -6.276,3.376 -6.302,3.378 -6.328,3.381 -6.354,3.386 -6.379,3.392 -6.405,3.399 -6.429,3.408 -6.453,3.418 -6.477,3.429 -6.5,3.442 -6.522,3.456 -6.544,3.47 -6.565,3.486 -6.585,3.503 -6.604,3.521 -6.622,3.54 -6.639,3.56 -6.655,3.581 -6.669,3.603 -6.683,3.625 -6.696,3.648 -6.707,3.672 -6.717,3.696 -6.726,3.72 -6.733,3.746 -6.739,3.771 -6.744,3.797 -6.747,3.823 -6.749,3.849 -6.75,3.875 -6.749,3.901 -6.747,3.927 -6.744,3.953 -6.739,3.979 -6.733,4.004 -6.726,4.03 -6.717,4.054 -6.707,4.078 -6.696,4.102 -6.683,4.125 -6.669,4.147 -6.655,4.169 -6.639,4.19 -6.622,4.21 -6.604,4.229 -6.585,4.247 -6.565,4.264 -6.544,4.28 -6.522,4.294 -6.5,4.308 -6.477,4.321 -6.453,4.332 -6.429,4.342 -6.405,4.351 -6.379,4.358 -6.354,4.364 -6.328,4.369 -6.302,4.372 -6.276,4.374 -6.25,4.375 -5.65,4.375
  Top Layer region: 6.276,2.874 6.302,2.872 6.328,2.869 6.354,2.864 6.379,2.858 6.405,2.851 6.429,2.842 6.453,2.832 6.477,2.821 6.5,2.808 6.522,2.794 6.544,2.78 6.565,2.764 6.585,2.747 6.604,2.729 6.622,2.71 6.639,2.69 6.655,2.669 6.669,2.647 6.683,2.625 6.696,2.602 6.707,2.578 6.717,2.554 6.726,2.53 6.733,2.504 6.739,2.479 6.744,2.453 6.747,2.427 6.749,2.401 6.75,2.375 6.749,2.349 6.747,2.323 6.744,2.297 6.739,2.271 6.733,2.246 6.726,2.22 6.717,2.196 6.707,2.172 6.696,2.148 6.683,2.125 6.669,2.103 6.655,2.081 6.639,2.06 6.622,2.04 6.604,2.021 6.585,2.003 6.565,1.986 6.544,1.97 6.522,1.956 6.5,1.942 6.477,1.929 6.453,1.918 6.429,1.908 6.405,1.899 6.379,1.892 6.354,1.886 6.328,1.881 6.302,1.878 6.276,1.876 6.25,1.875 4.75,1.875 4.75,2.875 6.25,2.875
  Keep-Out Layer region: 6.25,5.775 -6.25,5.775 -6.25,10.125 6.25,10.125
  Keep-Out Layer region: 6.25,5.775 -6.25,5.775 -6.25,10.125 6.25,10.125
  Keep-Out Layer region: 6.25,5.775 -6.25,5.775 -6.25,10.125 6.25,10.125
  silkscreen extent -7.35,-4.37 6.25,5.77, body extent -6.25,-4.38 6.25,10.13, height 3.05
RESC1608X06N [mm] "Chip Resistor, 2-Leads, Body 1.60x0.80mm, IPC Medium Density"
  rrect50% 0.95x0.9 smd mask+0.064: 1(-0.775,0) 2(0.775,0)
  body extent -0.9,-0.45 0.9,0.45, height 0.55
SW_PTS810 [mm] "C&K Compnents, Momentary Tactile Switch,PTS810 Series"
  rrect50% 1.05x0.65 smd: 1(-2.075,1.075) 2(2.075,1.075) 3(-2.075,-1.075) 4(2.075,-1.075)
  silkscreen extent -3.5,-1.6 2.1,1.6, body extent -2.29,-1.6 2.29,1.6, height 2.5

## Part data
C1 C2 C3 C4 C5: library part CI-10uF-10V-X5R-SR-MRT, "Capacitor, 10uF, 10V, SM", Manufacturer=Murata, Manufacturer's Part #=GRM188R61A106KE69D, Package=0603, Supplier Part Number 1=490-10474-1-ND, Tolerance=10%, Voltage Rating=10V, Detailed Description="Capacitor, 10uF, 10V, SM 0603, Multilayer Ceramic, X5R, RoHS", Part=10uF, Revision=1, Supplier 1=Digi-Key, Supplier 2=Mouser, Supplier Part Number 2=81-GRM188R61A106KE9D, Type=Capacitor
R1 R2 R3 R4: library part RP-10K-SR-KOA, "Resistor, 10K ohms, 1/8W, 1%, SM", Manufacturer="KOA Speer", Manufacturer's Part #=RK73H1JTTD1002F, Package=0603, Power Rating=1/8W, Supplier Part Number 1=2019-RK73H1JTTD1002FCT-ND, Tolerance=1%, Voltage Rating=75V, Detailed Description="Resistor, 10K ohms, 1/8W, 1%, 100 ppm, SM, 75 WV, 100 OV, Thick Film, 0603, RoHS", Part=10K, Resistance=10K, Revision=1, Supplier 1=Digi-Key, Supplier 2=Mouser, Supplier 3="Arrow Electronics", Supplier Part Number 2=660-RK73H1JTTD1002F, Supplier Part Number 3=RK73H1JTTD1002F, Type=Resistor
R5 R6 R7 R8: library part RP-47K-SR-KOA, "Resistor, 47K ohms, 1/8W, 1%, SM", Manufacturer="KOA Speer", Manufacturer's Part #=RK73H1JTTD6802F, Package=0603, Power Rating=1/8W, Supplier Part Number 1=2019-RK73H1JTTD6802FCT-ND, Tolerance=1%, Voltage Rating=75V, Detailed Description="Resistor, 47K ohms, 1/8W, 1%, 100 ppm, SM, 75 WV, 100 OV, Thick Film, 0603, RoHS", Part=47K, Resistance=47K, Revision=1, Supplier 1=Digi-Key, Supplier 2=Mouser, Supplier 3="Arrow Electronics", Supplier Part Number 2=660-RK73H1JTTD6802F, Supplier Part Number 3=RK73H1JTTD6802F, Type=Resistor
SW1 SW2 SW3 SW4: library part SW-PTS810SJG250-SR-CKC, "Switch, Pushbutton, Top Actuated, SM", Manufacturer="C&K Components", Manufacturer's Part #="PTS810 SJG 250 SMTR LFS", Supplier Part Number 1=CKN10504CT-ND, Detailed Description="Switch, Pushbutton, Top Actuated, SM, RoHS", Part="SW, Momentary", Revision=1, Supplier 1=Digi-Key, Supplier 2=Newark, Supplier Part Number 2=35AH5293, Type="Switch, Pushbutton"
U1: library part UD-DA14531MOD-00F01002-SR-DLG, "DA14531MOD, Bluetooth Low Energy 5.1 Module, SM", Manufacturer 1="Renesas Electronics", Manufacturer Part Number 1=DA14531MOD-00F01002, Package="16-SMD Module", Supplier Part Number 1=1695-DA14531MOD-00F01002CT-ND, Detailed Description="DA14531MOD, Bluetooth Low Energy 5.1 Module, 128 kB Flash, 144kB ROM, 48kB RAM, 16-SMD Module, SM, RoHS", Part=DA14531MOD, Revision=1, Supplier 1=Digi-Key, Supplier 2=Mouser, Supplier Part Number 2=724-DA14531MODF01002, Type="BLE 5.1 Module"

## Via types
v1: diameter 20, hole 10, Top Layer to Bottom Layer, 6 vias

## Nets (pads, with @x,y where several pads share a name; then routed paths per layer and width w, separated by ;. In a path a pad name is that pad's centre, name@x,y a point inside that pad or via, vN(x,y) a via of type N, cw(c..) or ccw(c..) an arc to the next point about the centre after c; other vN are vias at no path point)
3V3: C1.1 R1.1 R2.1 R3.1 R4.1 U1.J7 | length 1294.7
  Top Layer w10: R2.1 419.49,529.51 439.39,509.61 507.86,509.61 540.47,477 563.06,477 566.14,480.08 ; 677,650 R4.1
  Top Layer w15: R1.1 399.49,250 419.49,270 R3.1 419,350 419,449.51 419.49,450 419.49,529.51 ; 566.14,480.08 571.72,474.5 610.56,474.5 625.5,489.44 625.5,531.58 621.57,535.51 621.57,594.57 677,650 ; R4.1 719.49,667.98 760,708.49 915.94,708.49 967.45,760 ; U1.J7 967.45,760 ; C1.1 967.45,700 967.45,760
GND: C1.2 C2.2 C3.2 C4.2 C5.2 SW1.1 SW1.2 SW2.1 SW2.2 SW3.1 SW3.2 SW4.1 SW4.2 U1.J2 U1.J3 U1.J4 U1.J6 U1.J11 | length 4419
  Top Layer w10: SW1.1 SW1.2 ; U1.J2 U1.J3 U1.J4 893,925.39 ; 1133.68,600 1157.68,576 ; SW4.2 SW4.1 ; SW3.1 SW3.2
  Top Layer w15: C2.2 C3.2 700,950 793.5,1043.5 U1.J2 ; U1.J6 908.4,910 893,925.39 1115.61,925.39 1203.67,837.33 U1.J11 1203.67,726.13 1157.68,680.13 1157.68,576 SW2.2 1157.68,510 1104.47,510 1027,432.53 1027,390.47 1107.36,310.12 ; SW1.2 989.57,192.32 1107.36,310.12 ; C1.2 1133.68,600 ; SW4.1 1239.63,279 ; SW3.1 1369.37,330 1290.63,330 ; C5.2 1528.54,1000 C4.2 1528.54,912.46 1576,865 1576,335 1520,279 1239.63,279 ; 1107.36,310.12 SW2.1@1157.68,360.43 ; SW2.1@1157.68,360.43 1157.68,281 1159.68,279 1239.63,279 ; SW2.1@1157.68,360.43 SW2.1 1195.99,330 1290.63,330 ; 1239.63,279 1290.63,330
NetC2_1: C2.1 R5.2 U1.J14 | length 1615.6
  Top Layer w15: R5.2 180.51,706 521.46,1046.94 521.46,1141.21 530.24,1150 728,1150 729,1149 905,1149 1069.55,984.45 U1.J14
NetC3_1: C3.1 R6.2 U1.J5 | length 517.2
  Top Layer w15: C3.1 521.46,910 530.51,900.94 ; R6.2 530.51,900.94 ; U1.J5 565.12,866.34 530.51,900.94
NetC4_1: C4.1 R7.2 U1.J13 | length 451.6
  Top Layer w15: U1.J13 1359.46,925.39 ; C4.1 1388.61,950 1364,925.39 1359.46,925.39 ; R7.2 1534.85,750 1359.46,925.39
NetC5_1: C5.1 R8.2 U1.J16 | length 1098.5
  Top Layer w15: R8.2 v1(870,450) ; v1(1212,1011) 1212,1074.56 1240,1102.56 U1.J16 1368.9,1102.56 C5.1
  Bottom Layer w15: v1(870,450) 870,669 v1(1212,1011)
NetR1_2: R1.2 R5.1 SW1.3 SW1.4 | length 1157.1
  Top Layer w10: SW1.3 SW1.4
  Top Layer w15: R5.1 119.49,290.51 160,250 R1.2 319.49,148.19 360,107.68 SW1.3
NetR2_2: R2.2 R6.1 SW2.3 SW2.4 | length 1216.6
  Top Layer w10: R6.1 469.49,655.02 480.51,644 R2.2 ; SW2.3 1242.32,447.32 SW2.4
  Top Layer w15: R2.2 541.21,550 550,541.21 v1(550,500) ; v1(1218,423) 1242.32,447.32
  Bottom Layer w15: v1(550,500) 627,423 v1(1218,423)
NetR3_2: R3.2 R7.1 SW3.3 SW3.4 | length 1492
  Top Layer w10: SW3.3 SW3.4
  Top Layer w15: R3.2 v1(532,350) ; R7.1 1469.49,698.83 1542.32,626 SW3.4 ; v1(1542.32,350) SW3.3
  Bottom Layer w15: v1(532,350) v1(1542.32,350)
NetR4_2: R4.2 R8.1 SW4.3 SW4.4 | length 1068.5
  Top Layer w10: SW4.4 1107.68,179.68 SW4.3
  Top Layer w15: R4.2 780.51,599 719.49,537.98 R8.1 719.49,179.51 745,154 1082,154 1107.68,179.68
pads on no net: U1.J1 U1.J8 U1.J9 U1.J10 U1.J12 U1.J15

## Polygon pours and split planes (outlines as drawn)
GND on Bottom Layer "GND_L04_P001" (solid, pour order 1): 0,1200 0,0 1750,0 1750,1200
3V3 on Top Layer "3V3_L01_P000" (solid, pour order 0): 0,1200 1750,1200 1750,0 0,0
3V3 on Int2 (3V3) (split plane): 1729.9,20.1 20.1,20.1 20.1,1179.9 1729.9,1179.9
GND on Int1 (GND) (split plane): 1729.9,20.1 20.1,20.1 20.1,1179.9 1729.9,1179.9

## Other copper
Top Layer:
  pour cut-out: 801.81,1200 801.81,1177.36 1310.25,1177.36 1310.25,1200
Bottom Layer:
  pour cut-out: 1310.25,1200 1310.25,1177.36 801.81,1177.36 801.81,1200

## Silkscreen, mask and mechanical layers (free items; w line width, h text height)
Board outline:
  the board outline again, w30